# EAGLE board bareshield (EAGLE 6.1)
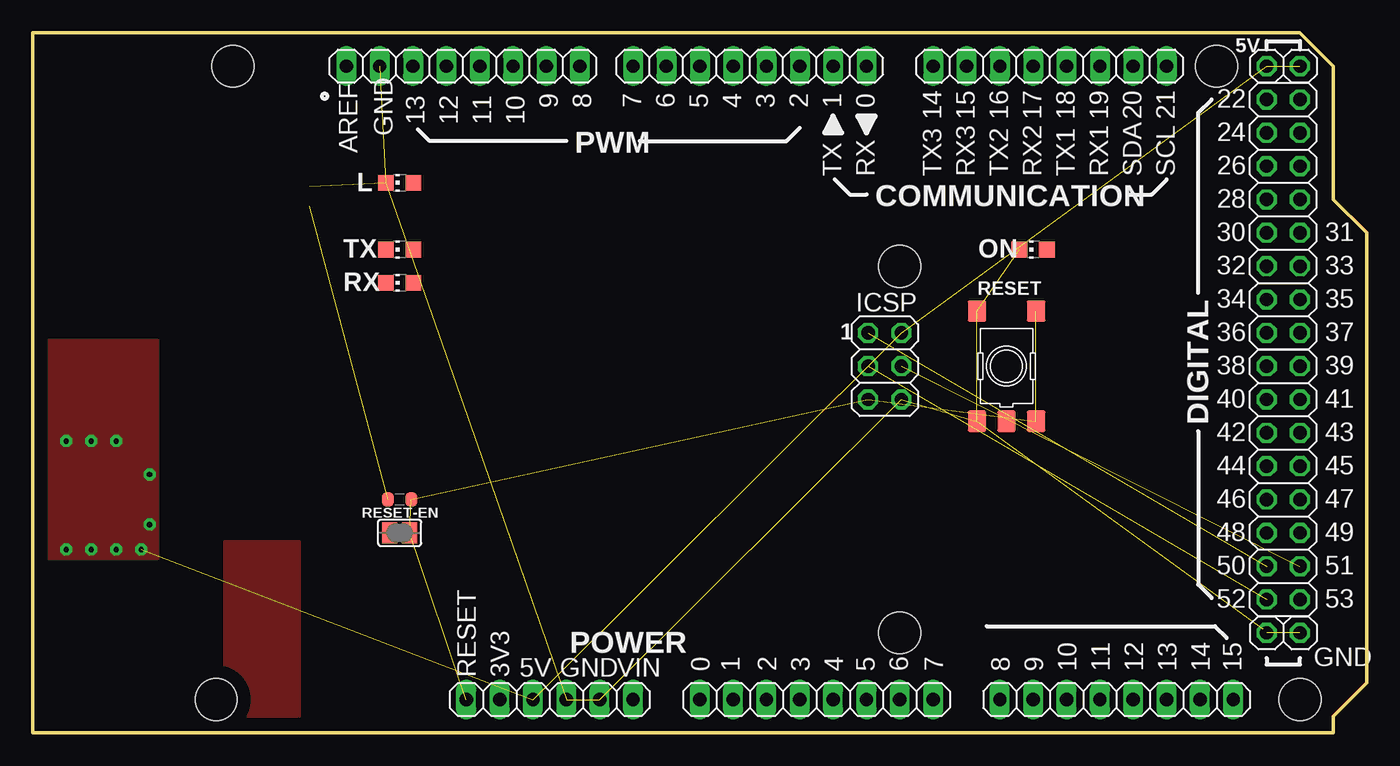
[diagram p0: board, top side]
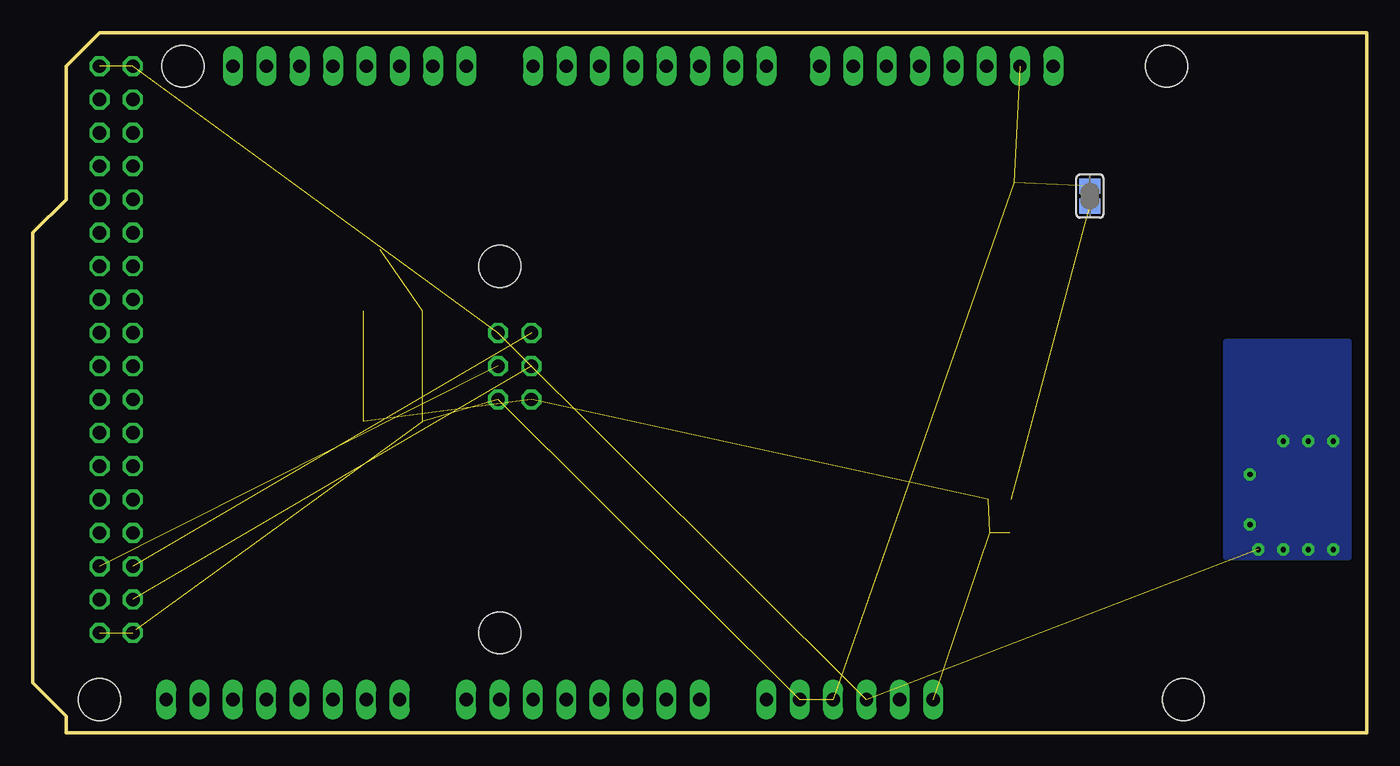
[diagram p1: board, bottom side, seen from below]

Size 101.6 x 53.34 mm. Coordinates in mm from the lower left corner, seen from the top.
Outline: 0,53.34 96.52,53.34 99.06,50.8 99.06,40.64 101.6,38.1 101.6,3.81 99.06,1.27 99.06,0 0,0 0,53.34
Copper layers (1*16): Top 0.035mm / dielectric 1.5mm / Bottom 0.035mm
Design rules: minimum track width 6mil, minimum drill 12mil, track to track 6mil, track to pad 6mil, pad to pad 6mil, via to via 6mil, smd to smd 6mil, copper to edge 40mil, drill to drill 12mil, minimum pad ring 10mil, minimum via ring 10mil, stop-mask expansion 2mil, vias tented up to drill 1mil, thermal gap 10mil
Net classes: 0 default: width 0.152 mm, drill 0.305 mm, clearance 0.152 mm
Holes 3.2 mm at 96.52,2.54 15.24,50.8 90.17,50.8 13.97,2.54 66.04,35.56 66.04,7.62

## Footprints (pad centres in the part's own frame; a part is rotated, then mirrored left to right if it is on the bottom)
1X08 = drill 1.016 long: 1 -8.89,0; 2 -6.35,0; 3 -3.81,0; 4 -1.27,0; 5 1.27,0; 6 3.81,0; 7 6.35,0; 8 8.89,0
C0603-ROUND = smd 0.898 x 1.1: 1 -0.889,0; 2 0.889,0
2X03 = drill 1.016 octagon: 1 -2.54,-1.27; 2 -2.54,1.27; 3 0,-1.27; 4 0,1.27; 5 2.54,-1.27; 6 2.54,1.27
1X01 = drill 1.016 octagon: 1 0,0
CHIP-LED0805 = smd 1.2 x 1.2: A 0,-1.05; C 0,1.05
1X06 = drill 1.016 long: 1 -6.35,0; 2 -3.81,0; 3 -1.27,0; 4 1.27,0; 5 3.81,0; 6 6.35,0
TS42 = smd 1.6 x 1.4: 1 -4.2,2.25; 2 4.2,2.25; 3 -4.2,-2.25; 4 4.2,-2.25; 5 -4.2,0
SJ = smd 1.168 x 1.6: 1 -0.762,0; 2 0.762,0
2X08 = drill 1.016 octagon: 1 -8.89,-1.27; 2 -8.89,1.27; 3 -6.35,-1.27; 4 -6.35,1.27; 5 -3.81,-1.27; 6 -3.81,1.27; 7 -1.27,-1.27; 8 -1.27,1.27; 9 1.27,-1.27; 10 1.27,1.27; 11 3.81,-1.27; 12 3.81,1.27; 13 6.35,-1.27; 14 6.35,1.27; 15 8.89,-1.27; 16 8.89,1.27

## Placement (x,y rotation side)
ADCH  [1X08]  82.55,2.54 0 top
ADCL  [1X08]  59.69,2.54 0 top
C7  100n  [C0603-ROUND]  27.94,17.78 0 top
COMMUNICATION  [1X08]  77.47,50.8 180 top
ICSP  ICSP  [2X03]  64.9,27.94 270 top
JP1  [1X01]  93.98,50.8 0 top
JP2  [1X01]  96.52,50.8 0 top
JP3  [1X01]  93.98,7.62 0 top
JP4  [1X01]  96.52,7.62 0 top
L  YELLOW  [CHIP-LED0805]  27.94,41.91 90 top
ON  GREEN  [CHIP-LED0805]  76.2,36.83 90 top
POWER  [1X06]  39.37,2.54 0 top
PWMH  [1X08]  32.77,50.8 180 top
PWML  [1X08]  54.61,50.8 180 top
RESET  TS42  [TS42]  74.17,27.94 90 top
RESET-EN  [SJ]  27.94,15.24 0 top
RX  YELLOW  [CHIP-LED0805]  27.94,34.29 90 top
TX  YELLOW  [CHIP-LED0805]  27.94,36.83 90 top
UBOOT  [SJ]  21.08,40.89 90 bottom
XIOH  [2X08]  95.25,39.37 90 top
XIOL  [2X08]  95.25,19.05 90 top

## Library data of the parts
ADCH ADCL COMMUNICATION ICSP JP1-JP4 POWER PWMH PWML XIOH XIOL = pinhead
C7 = SmartPrj
L ON RX TX = led
RESET = st-mod v1.4
RESET-EN UBOOT = jumper

## Nets
5-GND: RESET.5
+3V3: POWER.2
+5V: ICSP.2 JP1.1 JP2.1 POWER.3
ADC0: ADCL.1
ADC1: ADCL.2
ADC2: ADCL.3
ADC3: ADCL.4
ADC4: ADCL.5
ADC5: ADCL.6
ADC6: ADCL.7
ADC7: ADCL.8
ADC8: ADCH.1
ADC9: ADCH.2
ADC10: ADCH.3
ADC11: ADCH.4
ADC12: ADCH.5
ADC13: ADCH.6
ADC14: ADCH.7
ADC15: ADCH.8
AREF: PWMH.8
DTR: C7.1 UBOOT.1
GND: ICSP.6 JP3.1 JP4.1 L.C ON.C POWER.4 POWER.5 PWMH.7 RESET.1 RESET.2 UBOOT.2
N$2: L.A
N$3: ON.A
N$55: TX.A
PA0: XIOH.16
PA1: XIOH.15
PA2: XIOH.14
PA3: XIOH.13
PA4: XIOH.12
PA5: XIOH.11
PA6: XIOH.10
PA7: XIOH.9
PB0: XIOL.1
PB1: ICSP.3 XIOL.2
PB2: ICSP.4 XIOL.3
PB3: ICSP.1 XIOL.4
PB4: PWMH.3
PB5: PWMH.4
PB6: PWMH.5
PB7: PWMH.6
PC0: XIOH.1
PC1: XIOH.2
PC2: XIOH.3
PC3: XIOH.4
PC4: XIOH.5
PC5: XIOH.6
PC6: XIOH.7
PC7: XIOH.8
PD7: XIOL.16
PE0: PWML.1
PE1: PWML.2
PE3: PWML.6
PE4: PWML.3
PE5: PWML.4
PG0: XIOL.13
PG1: XIOL.14
PG2: XIOL.15
PG5: PWML.5
PH3: PWML.7
PH4: PWML.8
PH5: PWMH.1
PH6: PWMH.2
PL0: XIOL.5
PL1: XIOL.6
PL2: XIOL.7
PL3: XIOL.8
PL4: XIOL.9
PL5: XIOL.10
PL6: XIOL.11
PL7: XIOL.12
RESET: C7.2 ICSP.5 POWER.1 RESET-EN.1 RESET-EN.2 RESET.3 RESET.4
RXD1: COMMUNICATION.3
RXD2: COMMUNICATION.5
RXD3: COMMUNICATION.7
RXL: RX.C
SCL: COMMUNICATION.1
SDA: COMMUNICATION.2
TXD1: COMMUNICATION.4
TXD2: COMMUNICATION.6
TXD3: COMMUNICATION.8
TXL: TX.C
VIN: POWER.6

## Tracks (layer width: path | path; a pad name or v marks a point on that pad's centre or on a via)
+5V  (via drill 0.41)  (4 unrouted)
  other vias: 6.35,22.23 4.45,22.23 2.54,22.23 8.89,19.68 2.54,13.97 6.35,13.97 4.45,13.97 8.89,15.88 8.26,13.97
  pour Top (isolate 0.305, no thermals): 9.53,13.34 9.53,29.84 0.64,29.84 0.64,13.34
  pour Bottom: 1.27,13.34 1.27,29.84 10.79,29.84 10.79,13.34
DTR  (1 unrouted)
GND  (10 unrouted)
  Bottom 0.813: 93.73,7.87 JP3.1
  pour Top (isolate 0.305, rank 2): 14.61,14.61 20.32,14.61 20.32,1.27 14.61,1.27
  pour Bottom (isolate 0.356, rank 2): 97.16,1.27 101.6,52.7 102.23,52.07 102.23,0.64
PB1  (1 unrouted)
PB2  (1 unrouted)
PB3  (1 unrouted)
RESET  (6 unrouted)

## Text on the board
tPlace: 9 | 8 | 7 | 6 | 5 | 4 | 3 | 2 | 1 | 0 | 22 | 14 | 15 | 16 | 17 | 18 | 19 | 20 | 21 | 13 | 12 | 11 | 10 | 24 | 26 | 28 | 30 | 31 | 32 | 33 | 34 | 35 | 36 | 37 | 38 | 39 | 40 | 41 | 42 | 43 | 44 | 45 | 46 | 47 | 48 | 49 | 50 | 51 | 52 | 53 | 0 | 1 | 2 | 3 | 4 | 5 | 6 | 7 | 8 | 9 | 10 | 11 | 12 | 13 | 14 | 15
tNames: 5V | GND | AREF | PWM | TX | RX | TX3 | RX3 | TX2 | RX2 | TX1 | RX1 | SDA | SCL | 1 | DIGITAL | GND | RESET | 3V3 | 5V | GND | VIN
ReferenceLC: L | TX | RX | PC1 | PC2